# Altium PCB PCB_fmcomms3_2021-03-24.pcbdoc
Units mil, origin at the board's own origin, x right, y up, seen from the top; angles counter-clockwise.
Board outline 4947.01 x 4947.01 mil, 2 copper layers (Top Layer, Bottom Layer); 11 components, 409 nets, 410 pads, 0 vias.
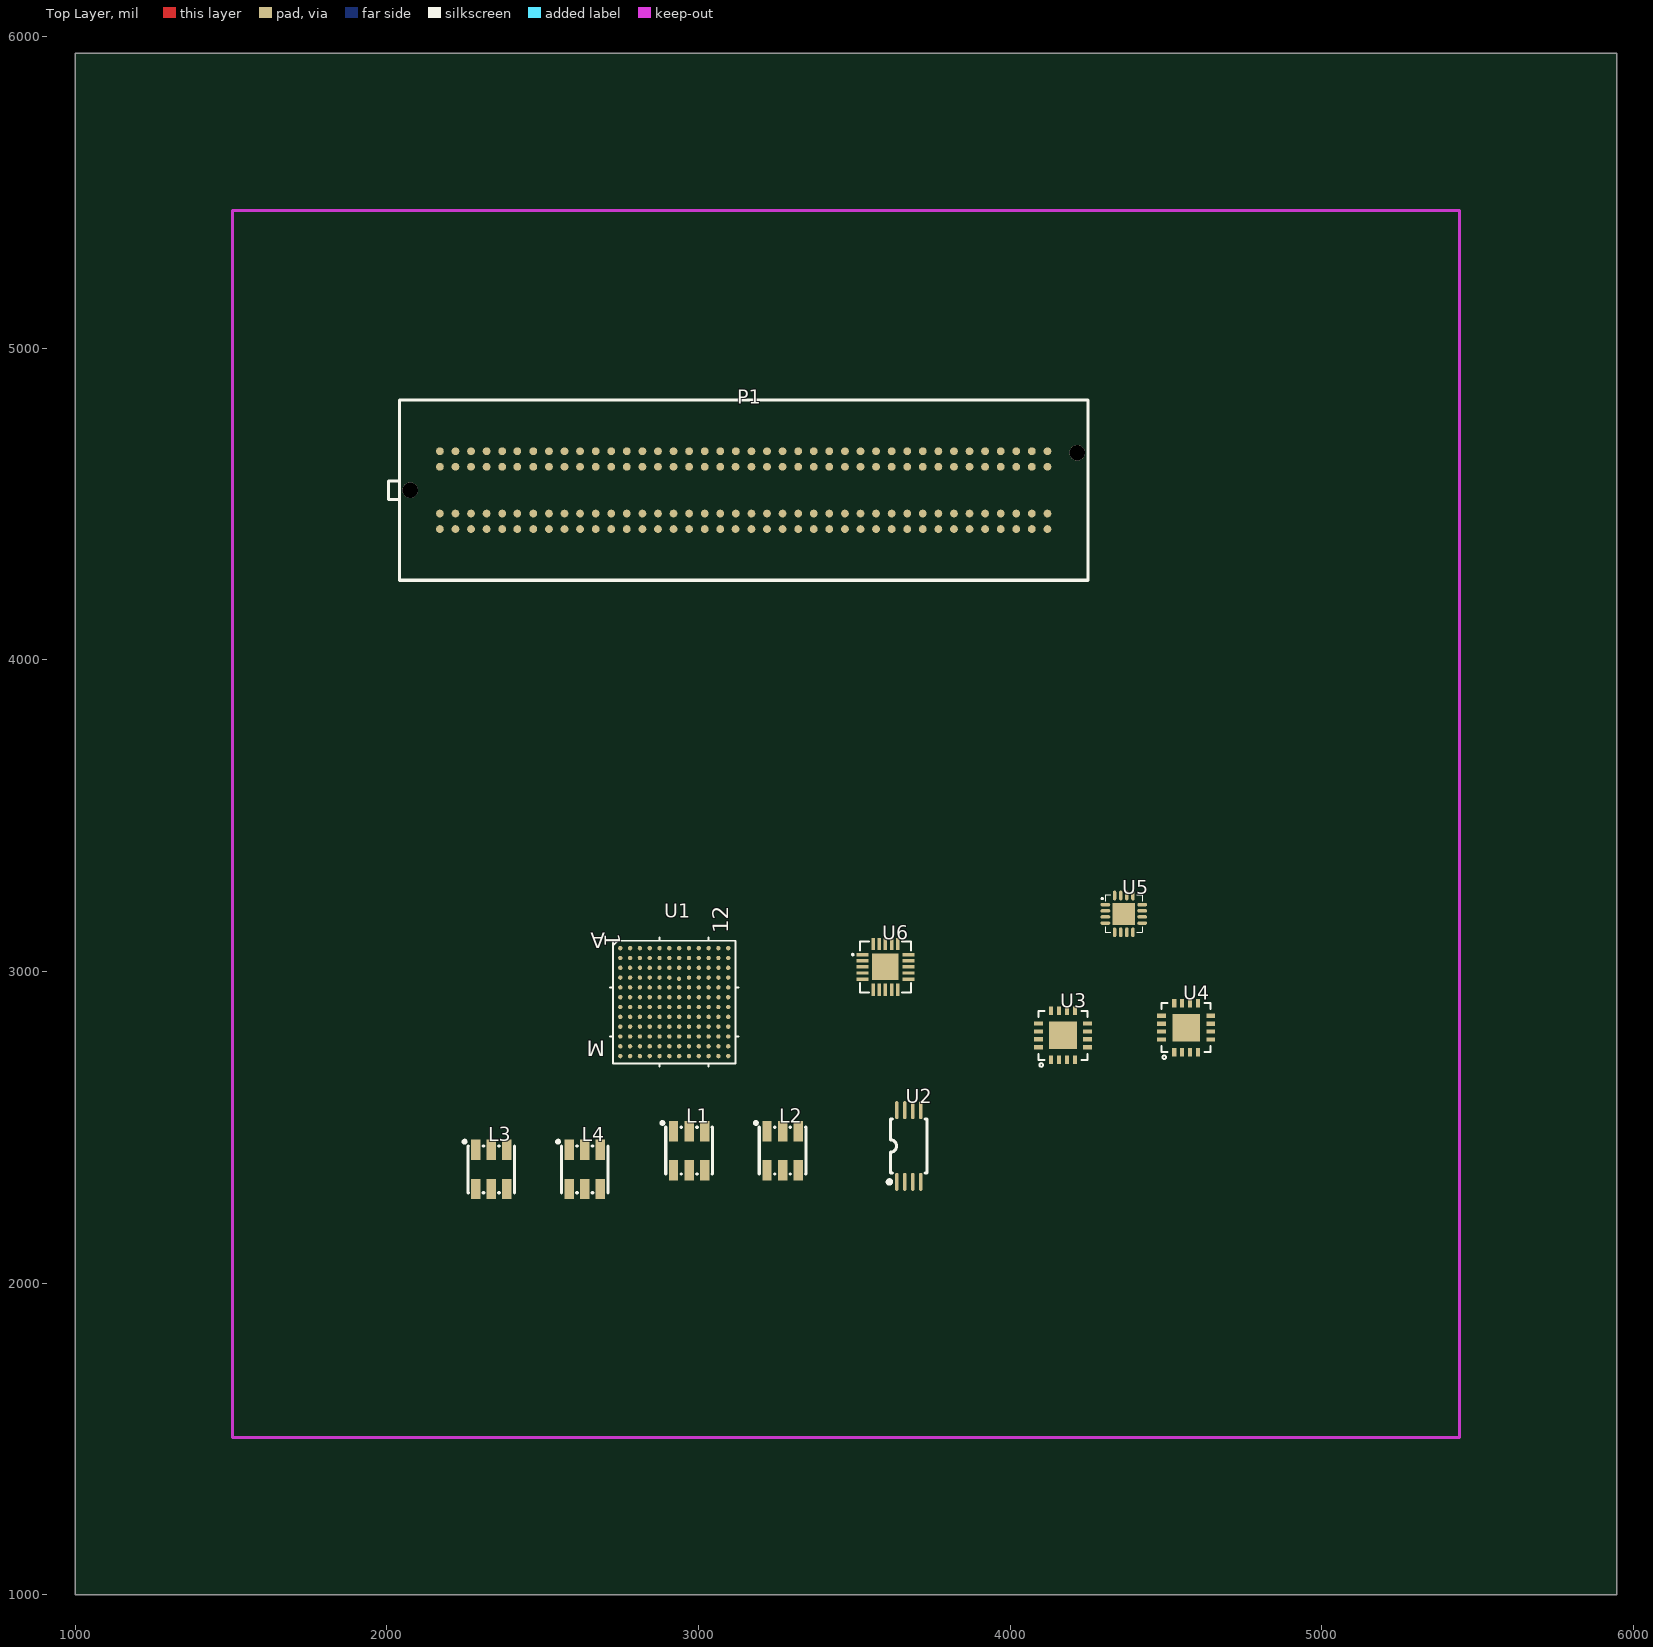
[diagram p0: Top Layer view]
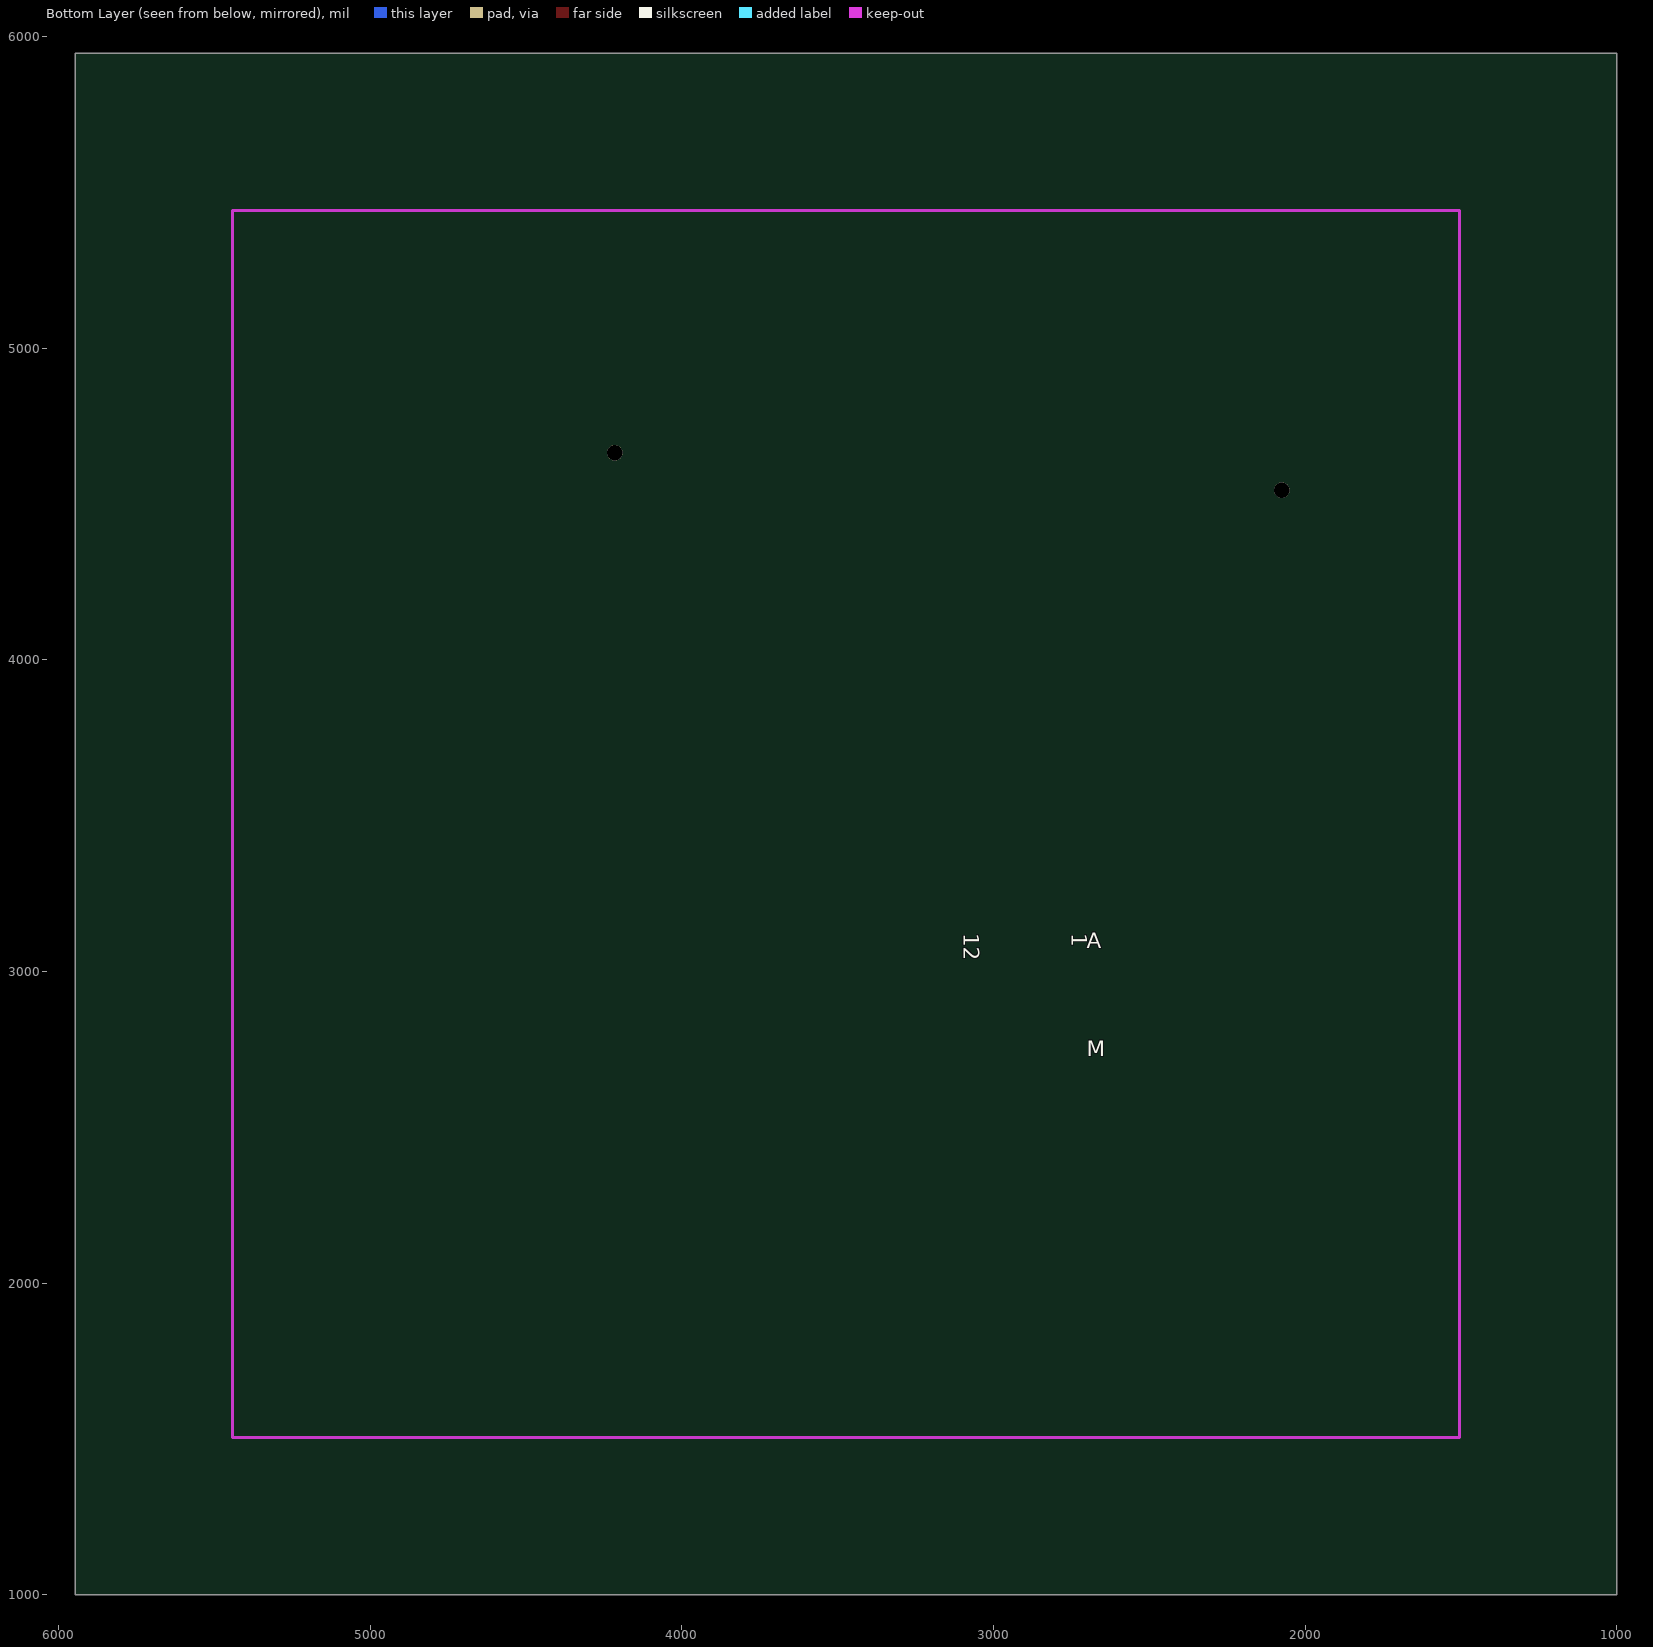
[diagram p1: Bottom Layer view, seen from below]

## Layer stack, top to bottom
Top Layer: signal copper (thickness not stored)
Dielectric: dielectric 12.6, FR-4, Dk 4.8
Bottom Layer: signal copper (thickness not stored)

## Board outline
5947.01,1000 1000,1000 1000,5947.01 5947.01,5947.01

## Components (designator, comment, footprint, x,y, rotation, side; value= is the part's Value field where it differs from the comment)
L1 "TCM1-63AX+" XFMR-SMD_TCM1-63AX 2970,2425 r0 top
L2 "TCM1-63AX+" XFMR-SMD_TCM1-63AX 3270,2425 r0 top
L3 "TCM1-63AX+" XFMR-SMD_TCM1-63AX 2335,2365 r0 top
L4 "TCM1-63AX+" XFMR-SMD_TCM1-63AX 2635,2365 r0 top
P1 "ASP-134604-01" ASP-134604-01 3185,4575 r0 top
U1 "AD9361BBCZ" BC_144_7 2910,2925 r0 top
U2 "M24C02-WDW6TP" TSSOP-8_L4.4-W3.0-P0.65-LS6.4-BL 3675,2440 r0 top
U3 "ADP1755ACPZ-R7" LFCSP-WQ-16_L4.0-W4.0-P0.65-EP2.3-BL-EP 4170,2795 r0 top
U4 "ADP1755ACPZ-R7" LFCSP-WQ-16_L4.0-W4.0-P0.65-EP2.3-BL-EP 4565,2820 r0 top
U5 "TLV62130ARGTR" VQFN-16_L3.0-W3.0-P0.50-TL-EP1.8 4365,3185 r0 top
U6 "AD7291BCPZ-RL7" LFCSP-20_L4.0-W4.0-P0.50-TL-EP2.7 3600,3015 r0 top

## Footprints (in the part's own frame and the unit in brackets; to place one, negate y for a bottom-side part, rotate by r counter-clockwise, add the part's x,y. Pads: shape width x height; smd on the part's side, far side on the other; paste and mask are expansions set on the pad)
ASP-134604-01 [mil]
  round 25 smd: C01(935,95) C02(885,95) C03(835,95) C04(785,95) C05(735,95) C06(685,95) C07(635,95) C08(585,95) C09(535,95) C10(485,95) C11(435,95) C12(385,95) C13(335,95) C14(285,95) C15(235,95) C16(185,95) C17(135,95) C18(85,95) C19(35,95) C20(-15,95) C21(-65,95) C22(-115,95) C23(-165,95) C24(-215,95) C25(-265,95) C26(-315,95) C27(-365,95) C28(-415,95) C29(-465,95) C30(-515,95) C31(-565,95) C32(-615,95) C33(-665,95) C34(-715,95) C35(-766.4,95) C36(-815,95) C37(-865,95) C38(-915,95) C39(-965,95) C40(-1015,95) D01(935,45) D02(885,45) D03(835,45) D04(785,45) D05(735,45) D06(685,45) D07(635,45) D08(585,45) D09(535,45) D10(485,45) D11(435,45) D12(385,45) D13(335,45) D14(285,45) D15(235,45) D16(185,45) D17(135,45) D18(85,45) D19(35,45) D20(-15,45) D21(-66,45) D22(-115,45) D23(-165,45) D24(-215,45) D25(-265,45) D26(-315,45) D27(-365,45) D28(-415,45) D29(-465,45) D30(-515,45) D31(-565,45) D32(-615,45) D33(-665,45) D34(-715,45) D35(-766.4,45) D36(-815,45) D37(-865,45) D38(-915,45) D39(-965,45) D40(-1015,45) G01(935,-105) G02(885,-105) G03(835,-105) G04(785,-105) G05(735,-105) G06(685,-105) G07(635,-105) G08(585,-105) G09(535,-105) G10(485,-105) G11(435,-105) G12(385,-105) G13(335,-105) G14(285,-105) G15(235,-105) G16(185,-105) G17(135,-105) G18(85,-105) G19(35,-105) G20(-15,-105) G21(-65,-105) G22(-115,-105) G23(-165,-105) G24(-215,-105) G25(-265,-105) G26(-315,-105) G27(-365,-105) G28(-415,-105) G29(-465,-105) G30(-515,-105) G31(-565,-105) G32(-615,-105) G33(-665,-105) G34(-715,-105) G35(-766.4,-105) G36(-815,-105) G37(-865,-105) G38(-915,-105) G39(-965,-105) G40(-1015,-105) H01(935,-155) H02(885,-155) H03(835,-155) H04(785,-155) H05(735,-155) H06(685,-155) H07(635,-155) H08(585,-155) H09(535,-155) H10(485,-155) H11(435,-155) H12(385,-155) H13(335,-155) H14(285,-155) H15(235,-155) H16(185,-155) H17(135,-155) H18(85,-155) H19(35,-155) H20(-15,-155) H21(-66,-155) H22(-115,-155) H23(-165,-155) H24(-215,-155) H25(-265,-155) H26(-315,-155) H27(-365,-155) H28(-415,-155) H29(-465,-155) H30(-515,-155) H31(-565,-155) H32(-615,-155) H33(-665,-155) H34(-715,-155) H35(-766.4,-155) H36(-815,-155) H37(-865,-155) H38(-915,-155) H39(-965,-155) H40(-1015,-155)
  round 50 hole 50 unplated: ""(-1110.5,-30) ""(1030.5,90)
  silkscreen extent -1180,-319 1066,259
BC_144_7 [mil]
  round 14 smd: A1(-160.94,150.01) A2(-129.45,150.01) A3(-97.95,150.01) A4(-66.46,150.01) A5(-34.96,150.01) A6(-3.46,150.01) A7(28.03,150.01) A8(59.53,150.01) A9(91.02,150.01) A10(122.52,150.01) A11(154.02,150.01) A12(185.51,150.01) B1(-160.94,118.51) B2(-129.45,118.51) B3(-97.95,118.51) B4(-66.46,118.51) B5(-34.96,118.51) B6(-3.46,118.51) B7(28.03,118.51) B8(59.53,118.51) B9(91.02,118.51) B10(122.52,118.51) B11(154.02,118.51) B12(185.51,118.51) C1(-160.94,87.02) C2(-129.45,87.02) C3(-97.95,87.02) C4(-66.46,87.02) C5(-34.96,87.02) C6(-3.46,87.02) C7(28.03,87.02) C8(59.53,87.02) C9(91.02,87.02) C10(122.52,87.02) C11(154.02,87.02) C12(185.51,87.02) D1(-160.94,55.52) D2(-129.45,55.52) D3(-97.95,55.52) D4(-66.46,55.52) D5(-34.96,55.52) D6(-3.46,55.52) D7(27.28,51.78) D8(59.53,55.52) D9(91.02,55.52) D10(122.52,55.52) D11(154.02,55.52) D12(185.51,55.52) E1(-160.94,24.02) E2(-129.45,24.02) E3(-97.95,24.02) E4(-66.46,24.02) E5(-34.96,24.02) E6(-3.46,24.02) E7(28.03,24.02) E8(59.53,24.02) E9(91.02,24.02) E10(122.52,24.02) E11(154.02,24.02) E12(185.51,24.02) F1(-160.94,-7.47) F2(-129.45,-7.47) F3(-97.95,-7.47) F4(-66.46,-7.47) F5(-34.96,-7.47) F6(-3.46,-7.47) F7(28.03,-7.47) F8(59.53,-7.47) F9(91.02,-7.47) F10(122.52,-7.47) F11(154.02,-7.47) F12(185.51,-7.47) G1(-160.94,-38.97) G2(-129.45,-38.97) G3(-97.95,-38.97) G4(-66.46,-38.97) G5(-34.96,-38.97) G6(-3.46,-38.97) G7(28.03,-38.97) G8(59.53,-38.97) G9(91.02,-38.97) G10(122.52,-38.97) G11(154.02,-38.97) G12(185.51,-38.97) H1(-160.94,-70.46) H2(-129.45,-70.46) H3(-97.95,-70.46) H4(-66.46,-70.46) H5(-34.96,-70.46) H6(-3.46,-70.46) H7(28.03,-70.46) H8(59.53,-70.46) H9(91.02,-70.46) H10(122.52,-70.46) H11(154.02,-70.46) H12(185.51,-70.46) J1(-160.94,-101.96) J2(-129.45,-101.96) J3(-97.95,-101.96) J4(-66.46,-101.96) J5(-34.96,-101.96) J6(-3.46,-101.96) J7(28.03,-101.96) J8(59.53,-101.96) J9(91.02,-101.96) J10(122.52,-101.96) J11(154.02,-101.96) J12(185.51,-101.96) K1(-160.94,-133.46) K2(-129.45,-133.46) K3(-97.95,-133.46) K4(-66.46,-133.46) K5(-34.96,-133.46) K6(-3.46,-133.46) K7(28.03,-133.46) K8(59.53,-133.46) K9(91.02,-133.46) K10(122.52,-133.46) K11(154.02,-133.46) K12(185.51,-133.46) L1(-160.94,-164.95) L2(-129.45,-164.95) L3(-97.95,-164.95) L4(-66.46,-164.95) L5(-34.96,-164.95) L6(-3.46,-164.95) L7(28.03,-164.95) L8(59.53,-164.95) L9(91.02,-164.95) L10(122.52,-164.95) L11(154.02,-164.95) L12(185.51,-164.95) M1(-160.94,-196.45) M2(-129.45,-196.45) M3(-97.95,-196.45) M4(-66.46,-196.45) M5(-34.96,-196.45) M6(-3.46,-196.45) M7(28.03,-196.45) M8(59.53,-196.45) M9(91.02,-196.45) M10(122.52,-196.45) M11(154.02,-196.45) M12(185.51,-196.45)
  silkscreen extent -195,-230 219,184
LFCSP-20_L4.0-W4.0-P0.50-TL-EP2.7 [mm]
  rect 0.985x0.28 smd: 1(-1.868,1) 2(-1.868,0.5) 3(-1.868,0) 4(-1.868,-0.5) 5(-1.868,-1) 11(1.868,-1) 12(1.868,-0.5) 13(1.868,0) 14(1.868,0.5) 15(1.868,1)
  rect 0.28x0.985 smd: 6(-1,-1.868) 7(-0.5,-1.868) 8(0,-1.868) 9(0.5,-1.868) 10(1,-1.868) 16(1,1.868) 17(0.5,1.868) 18(0,1.868) 19(-0.5,1.868) 20(-1,1.868)
  rect 2.15x2.15 smd: 21(0,0)
  silkscreen extent -2.73,-2.08 2.08,2.08
LFCSP-WQ-16_L4.0-W4.0-P0.65-EP2.3-BL-EP [mm]
  rect 0.35x0.7 smd: 1(-0.975,-2) 2(-0.325,-2) 3(0.325,-2) 4(0.975,-2) 9(0.975,2) 10(0.325,2) 11(-0.325,2) 12(-0.975,2)
  rect 0.7x0.35 smd: 5(2,-0.975) 6(2,-0.325) 7(2,0.325) 8(2,0.975) 13(-2,0.975) 14(-2,0.325) 15(-2,-0.325) 16(-2,-0.975)
  rect 2.25x2.25 smd: 17(0,0)
  silkscreen extent -2,-2.56 2,2
TSSOP-8_L4.4-W3.0-P0.65-LS6.4-BL [mm]
  oval 0.308x1.454 smd: 1(-0.975,-2.927) 2(-0.325,-2.927) 3(0.325,-2.927) 4(0.975,-2.927) 5(0.975,2.927) 6(0.325,2.927) 7(-0.325,2.927) 8(-0.975,2.927)
  silkscreen extent -1.73,-3.08 1.5,2.2
VQFN-16_L3.0-W3.0-P0.50-TL-EP1.8 [mm]
  oval 0.8x0.28 smd: 1(-1.5,0.749) 2(-1.5,0.249) 3(-1.5,-0.249) 4(-1.5,-0.749) 9(1.5,-0.749) 10(1.5,-0.249) 11(1.5,0.249) 12(1.5,0.749)
  oval 0.28x0.8 smd: 5(-0.749,-1.5) 6(-0.249,-1.5) 7(0.249,-1.5) 8(0.749,-1.5) 13(0.749,1.5) 14(0.249,1.5) 15(-0.249,1.5) 16(-0.749,1.5)
  rect 1.8x1.8 smd: 17(0,0)
  silkscreen extent -1.76,-1.5 1.5,1.5
XFMR-SMD_TCM1-63AX [mm]
  rect 0.76x1.65 smd: 1(-1.27,1.59) 2(0,1.59) 3(1.27,1.59) 4(1.27,-1.59) 5(0,-1.59) 6(-1.27,-1.59)
  silkscreen extent -2.29,-1.91 1.91,2.37

## Nets (pads, with @x,y where several pads share a name; then routed paths per layer and width w, separated by ;. In a path a pad name is that pad's centre, name@x,y a point inside that pad or via, vN(x,y) a via of type N, cw(c..) or ccw(c..) an arc to the next point about the centre after c; other vN are vias at no path point)
L1_1: L1.1
L1_2: L1.2
L1_3: L1.3
L1_4: L1.4
L1_5: L1.5
L1_6: L1.6
L2_1: L2.1
L2_2: L2.2
L2_3: L2.3
L2_4: L2.4
L2_5: L2.5
L2_6: L2.6
L3_1: L3.1
L3_2: L3.2
L3_3: L3.3
L3_4: L3.4
L3_5: L3.5
L3_6: L3.6
L4_1: L4.1
L4_2: L4.2
L4_3: L4.3
L4_4: L4.4
L4_5: L4.5
L4_6: L4.6
P1_C01: P1.C01
P1_C02: P1.C02
P1_C03: P1.C03
P1_C04: P1.C04
P1_C05: P1.C05
P1_C06: P1.C06
P1_C07: P1.C07
P1_C08: P1.C08
P1_C09: P1.C09
P1_C10: P1.C10
P1_C11: P1.C11
P1_C12: P1.C12
P1_C13: P1.C13
P1_C14: P1.C14
P1_C15: P1.C15
P1_C16: P1.C16
P1_C17: P1.C17
P1_C18: P1.C18
P1_C19: P1.C19
P1_C20: P1.C20
P1_C21: P1.C21
P1_C22: P1.C22
P1_C23: P1.C23
P1_C24: P1.C24
P1_C25: P1.C25
P1_C26: P1.C26
P1_C27: P1.C27
P1_C28: P1.C28
P1_C29: P1.C29
P1_C30: P1.C30
P1_C31: P1.C31
P1_C32: P1.C32
P1_C33: P1.C33
P1_C34: P1.C34
P1_C35: P1.C35
P1_C36: P1.C36
P1_C37: P1.C37
P1_C38: P1.C38
P1_C39: P1.C39
P1_C40: P1.C40
P1_D01: P1.D01
P1_D02: P1.D02
P1_D03: P1.D03
P1_D04: P1.D04
P1_D05: P1.D05
P1_D06: P1.D06
P1_D07: P1.D07
P1_D08: P1.D08
P1_D09: P1.D09
P1_D10: P1.D10
P1_D11: P1.D11
P1_D12: P1.D12
P1_D13: P1.D13
P1_D14: P1.D14
P1_D15: P1.D15
P1_D16: P1.D16
P1_D17: P1.D17
P1_D18: P1.D18
P1_D19: P1.D19
P1_D20: P1.D20
P1_D21: P1.D21
P1_D22: P1.D22
P1_D23: P1.D23
P1_D24: P1.D24
P1_D25: P1.D25
P1_D26: P1.D26
P1_D27: P1.D27
P1_D28: P1.D28
P1_D29: P1.D29
P1_D30: P1.D30
P1_D31: P1.D31
P1_D32: P1.D32
P1_D33: P1.D33
P1_D34: P1.D34
P1_D35: P1.D35
P1_D36: P1.D36
P1_D37: P1.D37
P1_D38: P1.D38
P1_D39: P1.D39
P1_D40: P1.D40
P1_G01: P1.G01
P1_G02: P1.G02
P1_G03: P1.G03
P1_G04: P1.G04
P1_G05: P1.G05
P1_G06: P1.G06
P1_G07: P1.G07
P1_G08: P1.G08
P1_G09: P1.G09
P1_G10: P1.G10
P1_G11: P1.G11
P1_G12: P1.G12
P1_G13: P1.G13
P1_G14: P1.G14
P1_G15: P1.G15
P1_G16: P1.G16
P1_G17: P1.G17
P1_G18: P1.G18
P1_G19: P1.G19
P1_G20: P1.G20
P1_G21: P1.G21
P1_G22: P1.G22
P1_G23: P1.G23
P1_G24: P1.G24
P1_G25: P1.G25
P1_G26: P1.G26
P1_G27: P1.G27
P1_G28: P1.G28
P1_G29: P1.G29
P1_G30: P1.G30
P1_G31: P1.G31
P1_G32: P1.G32
P1_G33: P1.G33
P1_G34: P1.G34
P1_G35: P1.G35
P1_G36: P1.G36
P1_G37: P1.G37
P1_G38: P1.G38
P1_G39: P1.G39
P1_G40: P1.G40
P1_H01: P1.H01
P1_H02: P1.H02
P1_H03: P1.H03
P1_H04: P1.H04
P1_H05: P1.H05
P1_H06: P1.H06
P1_H07: P1.H07
P1_H08: P1.H08
P1_H09: P1.H09
P1_H10: P1.H10
P1_H11: P1.H11
P1_H12: P1.H12
P1_H13: P1.H13
P1_H14: P1.H14
P1_H15: P1.H15
P1_H16: P1.H16
P1_H17: P1.H17
P1_H18: P1.H18
P1_H19: P1.H19
P1_H20: P1.H20
P1_H21: P1.H21
P1_H22: P1.H22
P1_H23: P1.H23
P1_H24: P1.H24
P1_H25: P1.H25
P1_H26: P1.H26
P1_H27: P1.H27
P1_H28: P1.H28
P1_H29: P1.H29
P1_H30: P1.H30
P1_H31: P1.H31
P1_H32: P1.H32
P1_H33: P1.H33
P1_H34: P1.H34
P1_H35: P1.H35
P1_H36: P1.H36
P1_H37: P1.H37
P1_H38: P1.H38
P1_H39: P1.H39
P1_H40: P1.H40
S$1045: 
U1_A1: U1.A1
U1_A2: U1.A2
U1_A3: U1.A3
U1_A4: U1.A4
U1_A5: U1.A5
U1_A6: U1.A6
U1_A7: U1.A7
U1_A8: U1.A8
U1_A9: U1.A9
U1_A10: U1.A10
U1_A11: U1.A11
U1_A12: U1.A12
U1_B1: U1.B1
U1_B2: U1.B2
U1_B3: U1.B3
U1_B4: U1.B4
U1_B5: U1.B5
U1_B6: U1.B6
U1_B7: U1.B7
U1_B8: U1.B8
U1_B9: U1.B9
U1_B10: U1.B10
U1_B11: U1.B11
U1_B12: U1.B12
U1_C1: U1.C1
U1_C2: U1.C2
U1_C3: U1.C3
U1_C4: U1.C4
U1_C5: U1.C5
U1_C6: U1.C6
U1_C7: U1.C7
U1_C8: U1.C8
U1_C9: U1.C9
U1_C10: U1.C10
U1_C11: U1.C11
U1_C12: U1.C12
U1_D1: U1.D1
U1_D2: U1.D2
U1_D3: U1.D3
U1_D4: U1.D4
U1_D5: U1.D5
U1_D6: U1.D6
U1_D7: U1.D7
U1_D8: U1.D8
U1_D9: U1.D9
U1_D10: U1.D10
U1_D11: U1.D11
U1_D12: U1.D12
U1_E1: U1.E1
U1_E2: U1.E2
U1_E3: U1.E3
U1_E4: U1.E4
U1_E5: U1.E5
U1_E6: U1.E6
U1_E7: U1.E7
U1_E8: U1.E8
U1_E9: U1.E9
U1_E10: U1.E10
U1_E11: U1.E11
U1_E12: U1.E12
U1_F1: U1.F1
U1_F2: U1.F2
U1_F3: U1.F3
U1_F4: U1.F4
U1_F5: U1.F5
U1_F6: U1.F6
U1_F7: U1.F7
U1_F8: U1.F8
U1_F9: U1.F9
U1_F10: U1.F10
U1_F11: U1.F11
U1_F12: U1.F12
U1_G1: U1.G1
U1_G2: U1.G2
U1_G3: U1.G3
U1_G4: U1.G4
U1_G5: U1.G5
U1_G6: U1.G6
U1_G7: U1.G7
U1_G8: U1.G8
U1_G9: U1.G9
U1_G10: U1.G10
U1_G11: U1.G11
U1_G12: U1.G12
U1_H1: U1.H1
U1_H2: U1.H2
U1_H3: U1.H3
U1_H4: U1.H4
U1_H5: U1.H5
U1_H6: U1.H6
U1_H7: U1.H7
U1_H8: U1.H8
U1_H9: U1.H9
U1_H10: U1.H10
U1_H11: U1.H11
U1_H12: U1.H12
U1_J1: U1.J1
U1_J2: U1.J2
U1_J3: U1.J3
U1_J4: U1.J4
U1_J5: U1.J5
U1_J6: U1.J6
U1_J7: U1.J7
U1_J8: U1.J8
U1_J9: U1.J9
U1_J10: U1.J10
U1_J11: U1.J11
U1_J12: U1.J12
U1_K1: U1.K1
U1_K2: U1.K2
U1_K3: U1.K3
U1_K4: U1.K4
U1_K5: U1.K5
U1_K6: U1.K6
U1_K7: U1.K7
U1_K8: U1.K8
U1_K9: U1.K9
U1_K10: U1.K10
U1_K11: U1.K11
U1_K12: U1.K12
U1_L1: U1.L1
U1_L2: U1.L2
U1_L3: U1.L3
U1_L4: U1.L4
U1_L5: U1.L5
U1_L6: U1.L6
U1_L7: U1.L7
U1_L8: U1.L8
U1_L9: U1.L9
U1_L10: U1.L10
U1_L11: U1.L11
U1_L12: U1.L12
U1_M1: U1.M1
U1_M2: U1.M2
U1_M3: U1.M3
U1_M4: U1.M4
U1_M5: U1.M5
U1_M6: U1.M6
U1_M7: U1.M7
U1_M8: U1.M8
U1_M9: U1.M9
U1_M10: U1.M10
U1_M11: U1.M11
U1_M12: U1.M12
U2_1: U2.1
U2_2: U2.2
U2_3: U2.3
U2_4: U2.4
U2_5: U2.5
U2_6: U2.6
U2_7: U2.7
U2_8: U2.8
U3_1: U3.1
U3_2: U3.2
U3_3: U3.3
U3_4: U3.4
U3_5: U3.5
U3_6: U3.6
U3_7: U3.7
U3_8: U3.8
U3_9: U3.9
U3_10: U3.10
U3_11: U3.11
U3_12: U3.12
U3_13: U3.13
U3_14: U3.14
U3_15: U3.15
U3_16: U3.16
U3_17: U3.17
U4_1: U4.1
U4_2: U4.2
U4_3: U4.3
U4_4: U4.4
U4_5: U4.5
U4_6: U4.6
U4_7: U4.7
U4_8: U4.8
U4_9: U4.9
U4_10: U4.10
U4_11: U4.11
U4_12: U4.12
U4_13: U4.13
U4_14: U4.14
U4_15: U4.15
U4_16: U4.16
U4_17: U4.17
U5_1: U5.1
U5_2: U5.2
U5_3: U5.3
U5_4: U5.4
U5_5: U5.5
U5_6: U5.6
U5_7: U5.7
U5_8: U5.8
U5_9: U5.9
U5_10: U5.10
U5_11: U5.11
U5_12: U5.12
U5_13: U5.13
U5_14: U5.14
U5_15: U5.15
U5_16: U5.16
U5_17: U5.17
U6_1: U6.1
U6_2: U6.2
U6_3: U6.3
U6_4: U6.4
U6_5: U6.5
U6_6: U6.6
U6_7: U6.7
U6_8: U6.8
U6_9: U6.9
U6_10: U6.10
U6_11: U6.11
U6_12: U6.12
U6_13: U6.13
U6_14: U6.14
U6_15: U6.15
U6_16: U6.16
U6_17: U6.17
U6_18: U6.18
U6_19: U6.19
U6_20: U6.20
U6_21: U6.21
pads on no net: P1.

## Text inside footprints (layer, text, board x,y; h text height)
U1: Top Overlay "12" at 3095.51,3123.63 h50 r90; Top Overlay "1" at 2699.06,3123.63 h50 r270; Top Overlay "M" at 2700.43,2778.55 h50 r180; Top Overlay "A" at 2700.43,3125.01 h50 r180; Mechanical 1 "12" at 3095.51,3123.63 h50 r90; Mechanical 1 "1" at 2699.06,3123.63 h50 r270; Mechanical 1 "M" at 2700.43,2778.55 h50 r180; Mechanical 1 "A" at 2700.43,3125.01 h50 r180; Bottom Overlay "12" at 3095.51,3123.63 h50 r90; Bottom Overlay "1" at 2749.06,3123.63 h50 r90; Bottom Overlay "M" at 2700.43,2728.55 h50; Bottom Overlay "A" at 2700.43,3075.01 h50